# Altium PCB PCB_design01.PcbDoc
Units mm, origin at the board's own origin, x right, y up, seen from the top; angles counter-clockwise.
Board outline 101.47 x 99.44 mm, 2 copper layers (Top Layer, Bottom Layer); 55 components, 59 nets, 243 pads, 51 vias.
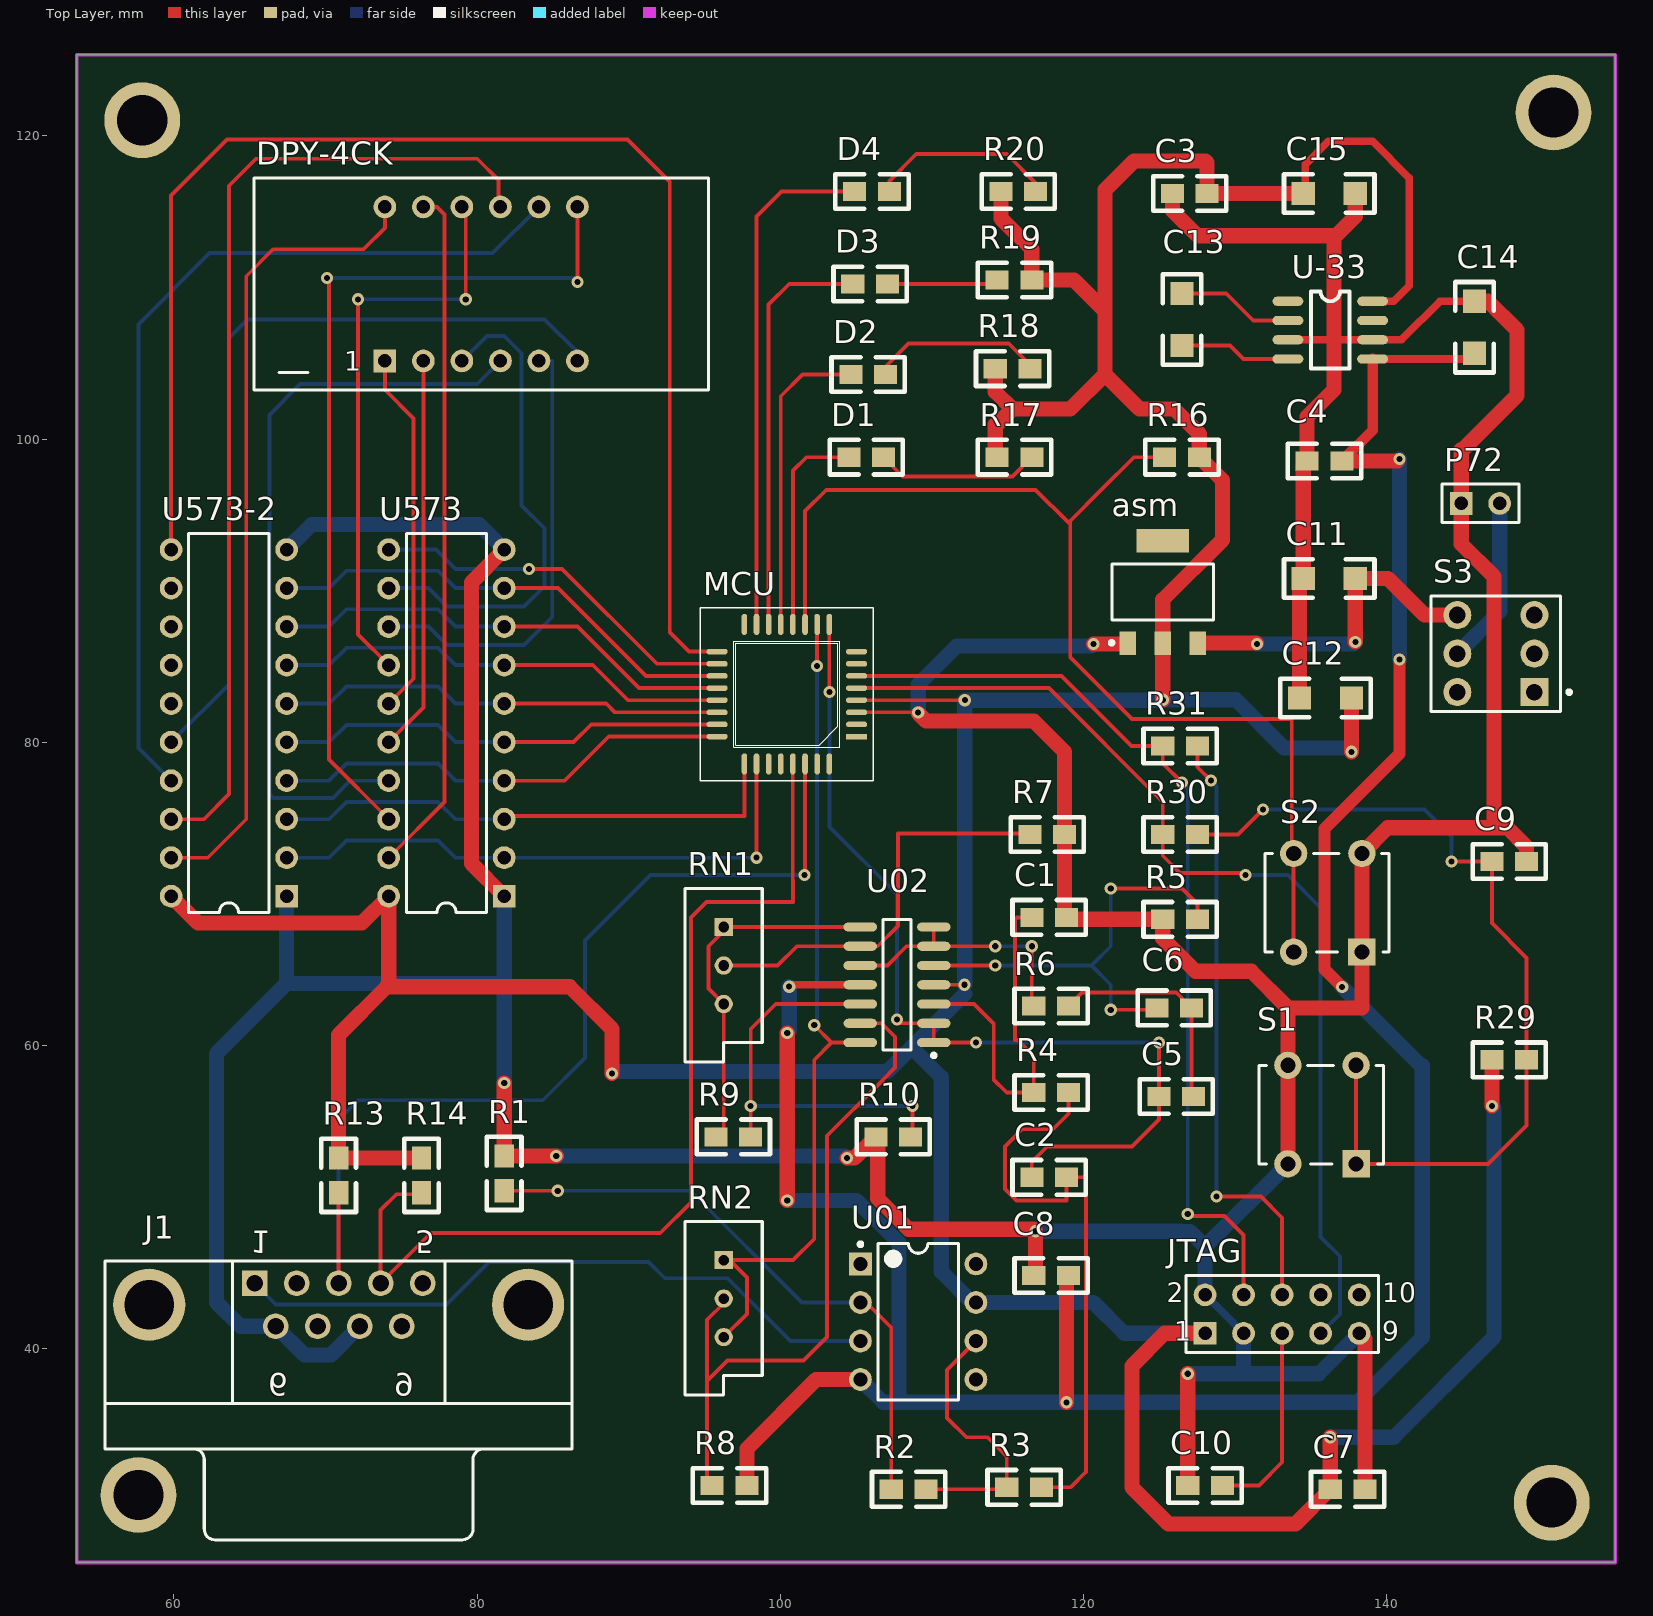
[diagram p0: Top Layer view]
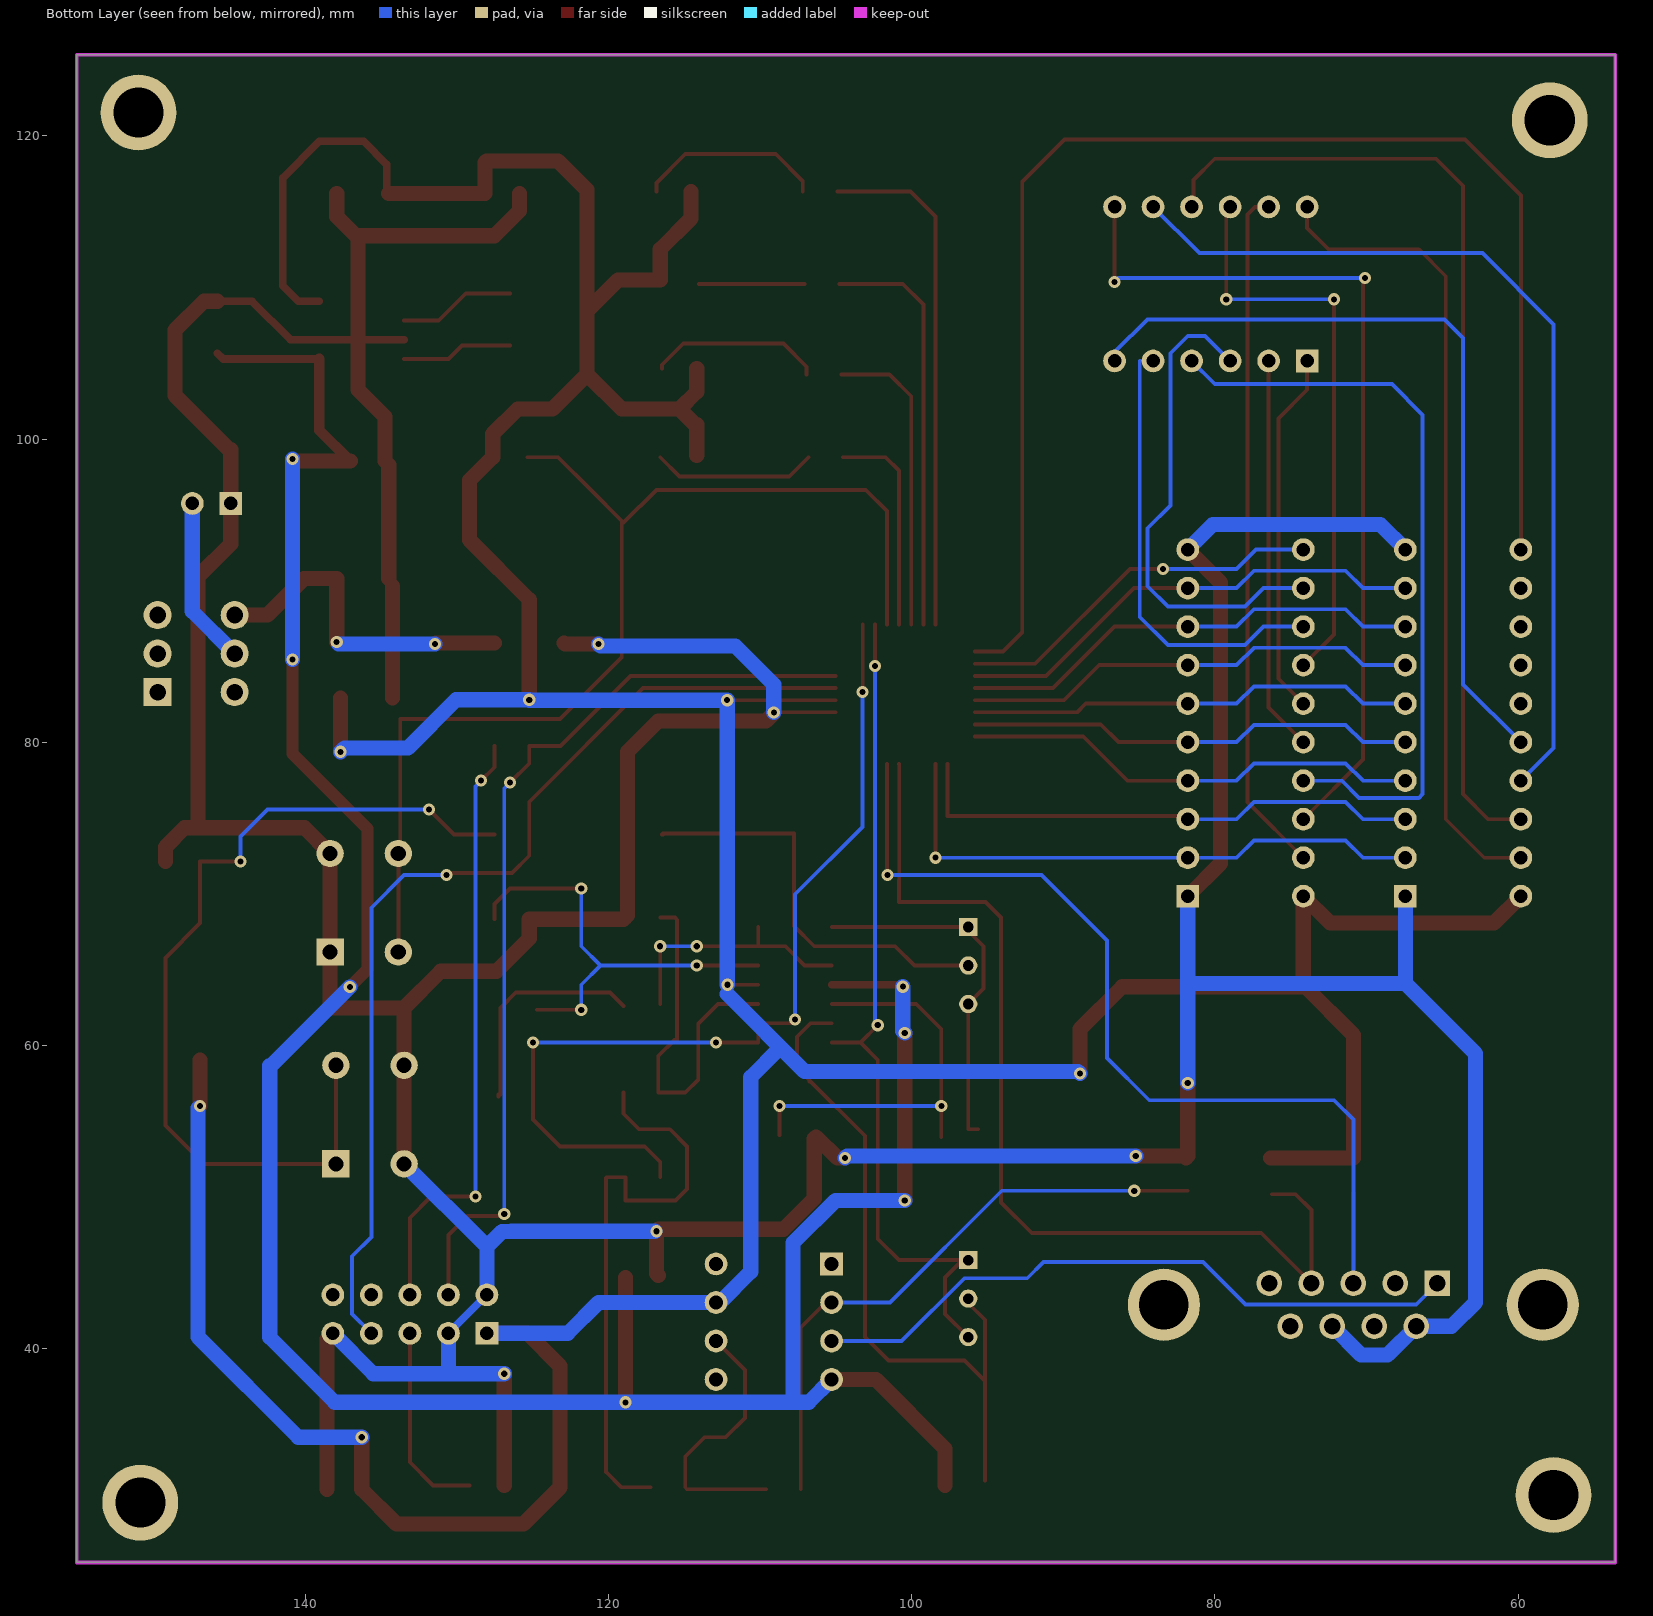
[diagram p1: Bottom Layer view, seen from below]

## Layer stack, top to bottom
Top Solder: solder mask 0.0102, Solder Resist, Dk 3.5
Top Layer: signal copper 0.0356
Dielectric 1: dielectric 0.32, FR-4, Dk 4.8
Bottom Layer: signal copper 0.0356
Bottom Solder: solder mask 0.0102, Solder Resist, Dk 3.5

## Board outline
53.594,25.908 155.067,25.908 155.067,125.349 53.594,125.349

## Design rules (kind name [scope] priority, off if disabled: settings)
Clearance [All] p1: gap=0.254
PolygonConnect [All] p1: connectstyle=Relief reliefconductorwidth=0.254 reliefentries=4 polygonreliefangle="90 Angle" airgapwidth=0.254
RoutingVias [All] p1: holewidth=0.4 width=0.8 viastyle="Through Hole" minholewidth=0.4 minwidth=0.8 maxholewidth=0.4 maxwidth=0.8
SolderMaskExpansion [All] p1: expansion=0.102
Width [All] p1: maxlimit=1 minlimit=0.254 preferedwidth=0.254 minimp=50.000000 maximp=50.000000 favimp=50.000000
30 further rules are at their usual default settings.

## Classes and differential pairs
component class design_cty: asm C1 C2 C3 C4 C5 C6 C7 C8 C9 C10 C11 C12 C13 C14 C15 D1 D2 D3 D4 J1 JTAG MCU P72 R1 R2 R3 R4 R5 R6 R7 R8 R9 R10 R13 R14 R16 R17 R18 R19 R20 R29 R30 R31 RN1 RN2 S1 S2 S3 U01 U02 U-33
component class Sheet2: DPY-4CK U573 U573-2

## Components (designator, comment, footprint, x,y, rotation, side; value= is the part's Value field where it differs from the comment)
asm "ASM1117" SOT-223 125.222,89.916 r0 top
C1 "Cap" 0805 118.872,68.453 r180 top
C2 "Cap" 0805 118.872,51.308 r180 top
C3 "Cap" 0805 128.143,116.205 r180 top
C4 "Cap" 0805 137.033,98.552 r180 top
C5 "Cap" 0805 124.968,56.642 r0 top
C6 "Cap" 0805 127.127,62.484 r180 top
C7 "Cap" 0805 136.271,30.734 r0 top
C8 "Cap" 0805 118.999,44.831 r180 top
C9 "Cap" 0805 149.225,72.136 r180 top
C10 "Cap" 0805 126.873,30.988 r0 top
C11 "Cap" 1206 134.493,90.805 r0 top
C12 "Cap" 1206 134.239,82.931 r0 top
C13 "Cap" 1206 126.492,109.601 r270 top
C14 "Cap" 1206 145.796,109.093 r270 top
C15 "Cap" 1206 137.922,116.205 r180 top
D1 "LED2" 0805 106.807,98.806 r180 top
D2 "LED2" 0805 106.934,104.267 r180 top
D3 "LED2" 0805 107.061,110.236 r180 top
D4 "LED2" 0805 107.188,116.332 r180 top
DPY-4CK "DPY-4CK" DYP-4BIT 80.264,110.236 r0 top
J1 "D Connector 9" DSUB1.385-2H9 70.866,33.401 r0 top
JTAG "Header 5X2" HDR2X5 128.016,41.021 r0 top
MCU "C8051F310" LQFP-32 105.029,85.979 r180 top
P72 "Header 2" HDR1X2 144.907,95.758 r0 top
R1 "Res2" 0805 81.788,52.705 r270 top
R2 "Res2" 0805 107.315,30.734 r0 top
R3 "Res2" 0805 114.935,30.861 r0 top
R4 "Res2" 0805 118.999,56.896 r180 top
R5 "Res2" 0805 125.222,68.326 r0 top
R6 "Res2" 0805 118.999,62.611 r180 top
R7 "Res2" 0805 118.745,73.914 r180 top
R8 "Res2" 0805 95.504,30.988 r0 top
R9 "Res2" 0805 95.758,53.975 r0 top
R10 "Res2" 0805 108.585,53.975 r180 top
R13 "Res2" 0805 70.866,50.292 r90 top
R14 "Res2" 0805 76.327,50.292 r90 top
R16 "Res2" 0805 125.349,98.806 r0 top
R17 "Res2" 0805 116.586,98.806 r180 top
R18 "Res2" 0805 116.459,104.648 r180 top
R19 "Res2" 0805 114.3,110.49 r0 top
R20 "Res2" 0805 116.84,116.332 r180 top
R29 "Res2" 0805 149.225,59.055 r180 top
R30 "Res2" 0805 127.508,73.914 r180 top
R31 "Res2" 0805 127.508,79.756 r180 top
RN1 "RPot" VR5 96.266,65.278 r270 top
RN2 "RPot" VR5 96.266,43.307 r270 top
S1 "K1" KEY1 133.477,52.197 r90 top
S2 "K1" KEY1 133.858,66.167 r90 top
S3 "SW-DPDT" DPDT-6 147.193,85.852 r180 top
U01 "OP-07" DIP-8 109.093,41.783 r0 top
U02 "TLC2274" SOP-14N 107.696,64.008 r180 top
U573 "SN74HC573N" N020D 77.978,81.28 r90 top
U573-2 "SN74HC573N" N020D 63.627,81.28 r90 top
U-33 "TC7662ACPA" SO-8 133.477,109.093 r0 top

## Footprints (in the part's own frame and the unit in brackets; to place one, negate y for a bottom-side part, rotate by r counter-clockwise, add the part's x,y. Pads: shape width x height; smd on the part's side, far side on the other; paste and mask are expansions set on the pad)
0805 [mil]
  rect 60x50 smd: 1(0,0) 2(90,0)
  silkscreen extent -50,-45 140,45
1206 [mil]
  rect 60x60 smd: 1(0,0) 2(135,0)
  silkscreen extent -50,-50 185,50
DIP-8 [mm] "DIP; 8 Leads; Row Spacing 7.62 mm; Pitch 2.54 mm"
  rect 1.5x1.5 hole 0.9: 1(-3.81,3.81)
  round 1.5 hole 0.9: 2(-3.81,1.27) 3(-3.81,-1.27) 4(-3.81,-3.81) 5(3.81,-3.81) 6(3.81,-1.27) 7(3.81,1.27) 8(3.81,3.81)
  silkscreen extent -3.93,-5.15 2.65,5.23, body extent -3.6,-5.15 3.6,5.15, height 5.08
DPDT-6 [mm] "Switch; 6 Leads"
  rect 1.85x1.85 hole 1.1: 1(-2.54,2.54)
  round 1.85 hole 1.1: 2(-2.54,0) 3(-2.54,-2.54) 4(2.54,-2.54) 5(2.54,0) 6(2.54,2.54)
  silkscreen extent -4.96,-3.81 4.28,3.81
DSUB1.385-2H9 [mm] "Connector; D Subminiature; 9 Position; Right Angle; Pitch 1.385 mm"
  rect 1.69x1.69 hole 1.09: 1(-5.54,10.92)
  round 1.69 hole 1.09: 2(-2.77,10.92) 3(0,10.92) 4(2.77,10.92) 5(5.54,10.92) 6(-4.155,8.08) 7(-1.385,8.08) 8(1.385,8.08) 9(4.155,8.08)
  round 4.76 hole 3.26: 10(-12.495,9.5) 11(12.495,9.5)
  silkscreen extent -15.4,-6 15.4,12.4
DYP-4BIT [mm] "数码管"
  rect 1.5x1.5 hole 0.9: 1(-6.35,-5.08)
  round 1.5 hole 0.9: 2(-3.81,-5.08) 3(-1.27,-5.08) 4(1.27,-5.08) 5(3.81,-5.08) 6(6.35,-5.08) 7(6.35,5.08) 8(3.81,5.08) 9(1.27,5.08) 10(-1.27,5.08) 11(-3.81,5.08) 12(-6.35,5.08)
  silkscreen extent -14.99,-6.98 14.99,6.98
HDR1X2 [mm] "Connector; Header; 2 Position"
  rect 1.5x1.5 hole 0.9: 1(0,0)
  round 1.5 hole 0.9: 2(2.54,0)
  silkscreen extent -1.27,-1.27 3.81,1.27
HDR2X5 [mm] "Connector; Header; 5x2 Position"
  rect 1.5x1.5 hole 0.9: 1(0,0)
  round 1.5 hole 0.9: 2(0,2.54) 3(2.54,0) 4(2.54,2.54) 5(5.08,0) 6(5.08,2.54) 7(7.62,0) 8(7.62,2.54) 9(10.16,0) 10(10.16,2.54)
  silkscreen extent -1.27,-1.27 11.43,3.81
KEY1 [mm]
  rect 1.8x1.8 hole 1: 1(0,-4.5)
  round 1.8 hole 1: 2(6.5,-4.5) 3(6.5,0) 4(0,0)
  silkscreen extent 0,-6.3 6.5,1.9
LQFP-32 [mm]
  rect 1.4x0.37 smd: 1(0,5.6)
  oval 1.4x0.37 smd: 2(0,4.8) 3(0,4) 4(0,3.2) 5(0,2.4) 6(0,1.6) 7(0,0.8) 8(0,0) 17(9.2,0) 18(9.2,0.8) 19(9.2,1.6) 20(9.2,2.4) 21(9.2,3.2) 22(9.2,4) 23(9.2,4.8) 24(9.2,5.6)
  oval 0.37x1.4 smd: 9(1.8,-1.8) 10(2.6,-1.8) 11(3.4,-1.8) 12(4.2,-1.8) 13(5,-1.8) 14(5.8,-1.8) 15(6.6,-1.8) 16(7.4,-1.8) 25(7.4,7.4) 26(6.6,7.4) 27(5.8,7.4) 28(5,7.4) 29(4.2,7.4) 30(3.4,7.4) 31(2.6,7.4) 32(1.8,7.4)
  silkscreen extent -1.1,-2.9 10.3,8.5
N020D [mm] "DIP; 20 Leads; Row Spacing 7.62 mm; Pitch 2.54 mm"
  rect 1.5x1.5 hole 0.9: 1(-11.43,-3.81)
  round 1.5 hole 0.9: 2(-8.89,-3.81) 3(-6.35,-3.81) 4(-3.81,-3.81) 5(-1.27,-3.81) 6(1.27,-3.81) 7(3.81,-3.81) 8(6.35,-3.81) 9(8.89,-3.81) 10(11.43,-3.81) 11(11.43,3.81) 12(8.89,3.81) 13(6.35,3.81) 14(3.81,3.81) 15(1.27,3.81) 16(-1.27,3.81) 17(-3.81,3.81) 18(-6.35,3.81) 19(-8.89,3.81) 20(-11.43,3.81)
  silkscreen extent -12.5,-2.65 12.5,2.65
SO-8 [mil]
  oval 80x24 smd: 1(0,0) 2(0,-50) 3(0,-100) 4(0,-150) 5(220,-150) 6(220,-100) 7(220,-50) 8(220,0)
  silkscreen extent 60,-175 160,25
SOP-14N [mm] "SOP, 14-Leads,"
  oval 2.2x0.6 smd: 1(-2.425,3.81) 2(-2.425,2.54) 3(-2.425,1.27) 4(-2.425,0) 5(-2.425,-1.27) 6(-2.425,-2.54) 7(-2.425,-3.81) 8(2.425,-3.81) 9(2.425,-2.54) 10(2.425,-1.27) 11(2.425,0) 12(2.425,1.27) 13(2.425,2.54) 14(2.425,3.81)
  silkscreen extent -2.55,-4.3 0.93,4.78, body extent -2,-4.28 2,4.28, height 1.75
SOT-223 [mm]
  rect 1.1x1.55 smd: 1(-2.3,-3.375) 2(0,-3.375) 3(2.3,-3.375)
  rect 3.45x1.55 smd: 4(0,3.375)
  silkscreen extent -3.5,-3.48 3.35,1.85, body extent -3.3,-3.94 3.3,3.43, height 0.8
VR5 [mm] "Thru-Hole; 3 Leads"
  rect 1.2x1.2 hole 0.7: 1(-2.54,0)
  round 1.2 hole 0.7: 2(0,0) 3(2.54,0)
  silkscreen extent -5.08,-2.54 6.35,2.54

## Part data
asm: "3.3V稳压芯片"
C1 C2 C3 C4 C5 C6 C7 C8 C9 C10 C11 C12 C13 C14 C15: "Capacitor"
D1 D2 D3 D4: "Typical RED, GREEN, YELLOW, AMBER GaAs LED"
DPY-4CK: "共阴4位数码管"
J1: "Receptacle Assembly, 9 Position, Right Angle"
JTAG: "Header, 5-Pin, Dual row"
MCU: library part C8051F310/2/4_361/4/6/8
P72: "Header, 2-Pin"
R1 R2 R3 R4 R5 R6 R7 R8 R9 R10 R13 R14 R16 R17 R18 R19 R20 R29 R30 R31: "Resistor"
RN1 RN2: "Potentiometer"
S3: "Double-Pole, Double-Throw Switch"
U02: library part LM324
U573 U573-2: "Octal D-Type Transparent Latch with 3-State Outputs"
U-33: "Super Charge Pump DC-to-DC Voltage Converter, 12kHz, 8-Pin PDIP, Commercial Temperature"

## Free pads (board coordinates)
  round 5 hole 3.3: 0(151.003,121.539) 1(150.876,29.845) 2(57.658,30.353) 3(57.912,121.031)

## Via types
v1: diameter 0.8, hole 0.4, Top Layer to Bottom Layer, 51 vias

## Nets (pads, with @x,y where several pads share a name; then routed paths per layer and width w, separated by ;. In a path a pad name is that pad's centre, name@x,y a point inside that pad or via, vN(x,y) a via of type N, cw(c..) or ccw(c..) an arc to the next point about the centre after c; other vN are vias at no path point)
A: DPY-4CK.11 U573.19 | length 45.6
  Top Layer w0.254: U573.19 77.851,76.073 77.851,114.808 77.343,115.316 DPY-4CK.11
AC: MCU.10 RN2.1 RN2.3 U02.14 | length 55.8
  Top Layer w0.254: RN2.3 97.79,42.291 97.79,44.704 96.647,45.847 100.838,45.847 102.235,47.244 102.235,59.055 103.378,60.198 ; v1(102.235,61.341) 103.378,60.198 ; v1(102.429,85.023) MCU.10 ; U02.14 103.378,60.198
  Bottom Layer w0.254: v1(102.235,61.341) 102.429,61.535 v1(102.429,85.023)
B: DPY-4CK.7 U573.18 | length 58.9
  Top Layer w0.254: v1(70.104,110.617) 70.231,110.49 70.231,78.867 U573.18 ; v1(86.614,110.363) DPY-4CK.7
  Bottom Layer w0.254: v1(70.104,110.617) 86.36,110.617 v1(86.614,110.363)
C: DPY-4CK.4 U573.17 | length 50.2
  Bottom Layer w0.254: U573.17 71.628,77.47 70.485,76.327 66.548,76.327 66.294,76.581 66.294,101.6 68.326,103.632 80.01,103.632 DPY-4CK.4
C2D: JTAG.4 MCU.6 R31.2 | length 61.9
  Top Layer w0.254: MCU.6 118.542,84.379 123.165,79.756 R31.2 125.222,78.613 v1(126.492,77.343) ; v1(126.873,48.895) 126.873,48.768 129.286,48.768 130.556,47.498 JTAG.4
  Bottom Layer w0.254: v1(126.492,77.343) 126.873,76.962 v1(126.873,48.895)
D: DPY-4CK.2 U573.16 | length 26.1
  Top Layer w0.254: U573.16 76.454,82.296 DPY-4CK.2
D0: MCU.26 U573-2.2 U573.2 | length 38.1
  Top Layer w0.254: v1(98.429,72.39) MCU.26
  Bottom Layer w0.254: U573-2.2 70.231,72.39 71.374,73.533 77.419,73.533 78.562,72.39 U573.2 v1(98.429,72.39)
D1: MCU.25 U573-2.3 U573.3 | length 34.3
  Top Layer w0.254: U573.3@82.008,75.15 97.629,75.15 MCU.25
  Bottom Layer w0.254: U573-2.3 70.231,74.93 71.374,76.073 77.419,76.073 78.562,74.93 U573.3
D2: MCU.24 U573-2.4 U573.4 | length 30.5
  Top Layer w0.254: U573.4 85.776,77.47 88.685,80.379 MCU.24
  Bottom Layer w0.254: U573-2.4 70.231,77.47 71.374,78.613 77.419,78.613 78.562,77.47 U573.4
D3: MCU.23 U573-2.5 U573.5 | length 29.8
  Top Layer w0.254: U573.5 86.36,80.01 87.529,81.179 MCU.23
  Bottom Layer w0.254: U573-2.5 70.231,80.01 71.374,81.153 77.419,81.153 78.562,80.01 U573.5
D4: MCU.22 U573-2.6 U573.6 | length 29.6
  Top Layer w0.254: U573.6 88.519,82.55 89.09,81.979 MCU.22
  Bottom Layer w0.254: U573-2.6 70.231,82.55 71.374,83.693 77.419,83.693 78.562,82.55 U573.6
D5: MCU.21 U573-2.7 U573.7 | length 30.3
  Top Layer w0.254: U573.7 87.63,85.09 89.941,82.779 MCU.21
  Bottom Layer w0.254: U573-2.7 70.231,85.09 71.374,86.233 77.419,86.233 78.562,85.09 U573.7
D6: MCU.20 U573-2.8 U573.8 | length 31
  Top Layer w0.254: U573.8 86.614,87.63 90.665,83.579 MCU.20
  Bottom Layer w0.254: U573-2.8 70.231,87.63 71.374,88.773 77.419,88.773 78.562,87.63 U573.8
D7: MCU.19 U573-2.9 U573.9 | length 31.7
  Top Layer w0.254: U573.9 85.344,90.17 91.135,84.379 MCU.19
  Bottom Layer w0.254: U573-2.9 70.231,90.17 71.374,91.313 77.419,91.313 78.562,90.17 U573.9
DC: C2.2 C5.1 MCU.9 U02.1 U02.2 | length 62.2
  Top Layer w0.254: MCU.9 103.229,83.29 v1(103.251,83.312) ; v1(107.696,61.722) 107.95,61.468 U02.2 U02.1 v1(112.903,60.198) ; C2.2 116.586,52.324 117.602,53.34 123.19,53.34 124.968,55.118 C5.1 v1(124.968,60.198)
  Bottom Layer w0.254: v1(103.251,83.312) 103.251,74.422 107.696,69.977 v1(107.696,61.722) ; v1(112.903,60.198) v1(124.968,60.198)
E: DPY-4CK.1 U573.15 | length 24.1
  Top Layer w0.254: DPY-4CK.1 73.914,103.251 75.807,101.358 75.807,84.189 U573.15
F: DPY-4CK.10 U573.14 | length 38.1
  Top Layer w0.254: v1(72.136,109.22) 72.136,87.122 U573.14 ; DPY-4CK.10@79.121,115.189 79.248,115.062 v1(79.248,109.22)
  Bottom Layer w0.254: v1(72.136,109.22) v1(79.248,109.22)
G: DPY-4CK.5 U573.13 | length 29.8
  Bottom Layer w0.254: U573.13 76.784,87.63 78.003,86.411 83.097,86.411 84.951,88.265 84.951,105.156 DPY-4CK.5
GND: asm.1 C1.1 C3.2 C4.2 C7.2 C8.2 C9.1 C10.1 C11.1 C12.1 C14.1 C15.1 J1.6 J1.8 JTAG.2 JTAG.3 JTAG.9 MCU.3 P72.1 R1.1 R5.1 R7.1 R10.2 S1.3 S1.4 S2.1 S2.2 U573-2.1 U573-2.10 U573.1 U573.10 U-33.3 U-33.6 | length 411.7
  Top Layer w0.254: MCU.3 v1(109.093,81.979) v1@109.11,81.979 ; C11.1@134.493,90.297 C11.1
  Top Layer w0.5: U-33.3 136.525,106.553 U-33.6 140.97,106.553 143.51,109.093 C14.1
  Top Layer w1: v1(81.788,57.531) R1.1 81.915,52.578 82.042,52.705 v1(85.217,52.705) ; U573.1 79.629,72.009 79.629,90.551 U573.10 ; v1(104.394,52.578) 104.902,52.578 R10.2 106.426,53.848 106.426,49.911 108.458,47.879 116.713,47.879 v1(116.84,47.752) 116.84,44.958 C8.2 ; v1@109.11,81.898 109.601,81.407 116.713,81.407 118.745,79.375 R7.1 C1.1@118.745,68.58 ; C1.1 118.999,68.326 R5.1 125.222,67.056 127.381,64.897 131.064,64.897 133.477,62.484 ; v1(120.65,86.487) 122.868,86.487 asm.1 ; C3.2 125.857,115.062 127.508,113.411 136.652,113.411 ; C10.1 v1(126.873,38.354) ; S1.4 S1.3 133.477,62.484 ; C12.1 C11.1@134.239,90.297 ; C11.1 C4.2@134.493,98.298 ; C4.2 134.747,101.473 136.525,103.251 136.525,106.553 136.525,113.284 136.652,113.411 ; C15.1 137.922,114.681 136.652,113.411 ; 138.358,62.484 133.477,62.484 ; 138.358,62.666 S2.1 S2.2 140.058,74.367 147.066,74.367 ; C7.2 JTAG.9@138.557,40.64 ; 144.907,99.314 P72.1 144.907,93.091 147.066,90.932 147.066,74.367 ; 145.034,99.314 148.59,102.87 148.59,107.188 146.685,109.093 C14.1 ; C9.1 149.225,73.097 147.955,74.367 147.066,74.367
  Bottom Layer w0.254: U573-2.10 U573-2.10@67.564,92.71 ; v1(116.84,47.752) v1@116.94,47.752
  Bottom Layer w0.5: JTAG.2 JTAG.3
  Bottom Layer w1: U573-2.1 67.437,64.087 ; U573-2.10 69.088,94.361 80.137,94.361 U573.10 ; 68.58,39.612 J1.6 64.389,41.481 62.817,43.053 62.817,59.467 67.437,64.087 ; 68.604,39.588 70.358,39.588 J1.8 ; 81.613,64.087 67.437,64.087 ; v1(81.788,57.531) U573.1 ; v1(85.217,52.705) 104.267,52.705 v1(104.394,52.578) ; v1(109.093,81.979) 109.093,83.82 111.633,86.36 120.523,86.36 v1(120.65,86.487) ; v1@116.94,47.752 126.384,47.752 126.395,47.741 127.011,47.741 128.016,46.736 ; v1(126.873,38.354) 130.556,38.354 ; JTAG.2 128.016,46.736 ; JTAG.3 130.556,38.354 ; S1.4 128.016,46.736 ; JTAG.9 135.509,38.354 130.556,38.354
H: DPY-4CK.3 U573.12 | length 32.4
  Bottom Layer w0.254: U573.12 76.784,90.17 78.003,88.951 83.097,88.951 84.443,90.297 84.443,94.119 82.931,95.631 82.931,105.664 81.788,106.807 80.645,106.807 DPY-4CK.3
LED1: D1.2 MCU.12 | length 14.2
  Top Layer w0.254: MCU.12 100.829,97.917 ; 100.838,97.917 101.727,98.806 D1.2
LED2: D2.2 MCU.13 | length 20.3
  Top Layer w0.254: MCU.13 100.029,102.823 101.473,104.267 D2.2
LED3: D3.2 MCU.14 | length 27.2
  Top Layer w0.254: MCU.14 99.229,108.881 100.584,110.236 D3.2
LED4: D4.2 MCU.15 | length 34.1
  Top Layer w0.254: MCU.15 98.429,114.681 100.08,116.332 D4.2
LED_INFRARED: J1.4 MCU.29 R14.1 | length 65.6
  Top Layer w0.254: R14.1@76.224,50.189 74.676,50.189 73.636,49.149 J1.4 76.94,47.625 92.075,47.625 94.107,49.657 94.107,68.453 95.123,69.469 100.838,69.469 100.838,70.904 100.819,70.924 100.819,78.569 MCU.29
LED_RED: J1.3 MCU.30 R13.1 | length 66.1
  Top Layer w0.254: J1.3 R13.1 ; v1(101.6,71.247) 101.629,71.276 MCU.30
  Bottom Layer w0.254: J1.3 70.866,55.118 72.136,56.388 84.328,56.388 87.122,59.182 87.122,66.929 91.44,71.247 v1(101.6,71.247)
Netasm_3: asm.3 C11.2 S3.4 | length 22.4
  Top Layer w0.254: v1@131.391,86.541 v1(131.445,86.487)
  Top Layer w1: asm.3 v1@131.391,86.541 ; v1(137.922,86.614) C11.2 140.081,90.805 142.494,88.392 S3.4
  Bottom Layer w0.254: v1@137.795,86.487 v1(137.922,86.614)
  Bottom Layer w1: v1(131.445,86.487) v1@137.795,86.487
NetC1_2: C1.2 R4.2 U02.3 | length 24.4
  Top Layer w0.254: U02.3 112.776,62.738 114.071,61.443 114.071,57.76 114.935,56.896 R4.2 116.713,59.309 115.646,60.376 115.468,60.376 115.468,68.301 115.621,68.453 C1.2
NetC2_1: C2.1 R3.2 R4.1 | length 39.2
  Top Layer w0.254: R3.2 119.126,30.861 120.142,31.877 ; R4.1 118.999,55.499 117.983,54.483 115.951,54.483 114.808,53.34 114.808,50.546 115.57,49.784 118.872,49.784 C2.1 120.142,51.308 120.167,51.283 120.167,31.877
NetC5_2: C5.2 C6.1 R6.1 | length 14.8
  Top Layer w0.254: R6.1 119.888,63.5 126.111,63.5 C6.1 C5.2@127.127,56.769 ; C5.2 C5.2@127.254,56.769
NetC6_2: C6.2 R5.2 U02.5 | length 29.5
  Top Layer w0.254: U02.5 v1(114.173,65.278) ; v1(121.793,62.357) C6.2@124.714,62.357 ; v1(121.793,70.358) 126.492,70.358 127.508,69.342 R5.2
  Bottom Layer w0.254: v1(114.173,65.278) 120.523,65.278 ; v1(121.793,62.357) 121.793,64.008 120.523,65.278 ; v1(121.793,70.358) 121.793,66.548 120.523,65.278
NetC9_2: C9.2 R29.1 R30.1 S1.1 S1.2 | length 59.6
  Top Layer w0.254: R30.1 130.175,73.914 v1(131.826,75.565) ; S1.2 S1.1 146.685,52.197 149.225,54.737 R29.1 149.225,65.786 146.939,68.072 C9.2 v1(144.272,72.136)
  Bottom Layer w0.254: v1(131.826,75.565) 142.494,75.565 144.272,73.787 v1(144.272,72.136)
NetC10_2: C10.2 JTAG.5 | length 13.1
  Top Layer w0.254: C10.2 131.572,30.988 133.096,32.512 JTAG.5
NetC13_1: C13.1 U-33.2 | length 7.7
  Top Layer w0.254: C13.1 129.413,109.601 131.191,107.823 U-33.2
NetC13_2: C13.2 U-33.4 | length 7.4
  Top Layer w0.254: C13.2 129.667,106.172 130.556,105.283 U-33.4
NetD1_1: D1.1 R17.1 | length 10.8
  Top Layer w0.254: D1.1 108.077,97.536 115.316,97.536 R17.1
NetD2_1: D2.1 R18.1 | length 11.5
  Top Layer w0.254: D2.1 106.934,104.775 108.458,106.299 115.062,106.299 116.459,104.902 R18.1
NetD3_1: D3.1 R19.1 | length 7
  Top Layer w0.254: D3.1 R19.1@114.046,110.236
NetD4_1: D4.1 R20.1 | length 12.4
  Top Layer w0.254: D4.1 107.188,117.018 108.966,118.796 114.935,118.796 116.84,116.891 R20.1
NetJTAG_6: JTAG.6 R31.1 | length 40.2
  Top Layer w0.254: R31.1 127.508,78.359 v1(128.397,77.47) ; v1(128.778,50.038) 131.699,50.038 133.096,48.641 JTAG.6
  Bottom Layer w0.254: v1(128.397,77.47) 128.778,77.089 v1(128.778,50.038)
NetP72_2: P72.2 S3.5 | length 11.1
  Bottom Layer w1: S3.5 147.447,88.646 P72.2
NetR1_2: R1.2 R2.1 U01.2 | length 39.9
  Top Layer w0.254: R1.2 v1(85.319,50.419) ; U01.2 105.664,43.053 107.315,41.402 R2.1
  Bottom Layer w0.254: v1(85.319,50.419) 94.056,50.419 101.422,43.053 U01.2
NetR6_2: R6.2 U02.6 U02.7 U02.10 | length 16.9
  Top Layer w0.254: U02.10 107.061,65.278 108.331,66.548 U02.6 ; U02.7 U02.6 ; v1(114.173,66.548) U02.6 ; R6.2@116.586,62.738 v1(116.586,66.548)
  Bottom Layer w0.254: v1(114.173,66.548) v1(116.586,66.548)
NetR7_2: R7.2 RN1.2 U02.9 | length 27.4
  Top Layer w0.254: RN1.2 99.822,65.278 101.092,66.548 U02.9 106.426,66.548 107.759,67.882 107.759,73.977 R7.2@116.395,73.977 ; R7.2@116.395,73.914 R7.2
NetR8_1: R8.1 RN2.2 U02.13 | length 46.1
  Top Layer w0.254: R8.1@95.174,31.318 95.174,37.871 ; RN2.2 96.266,43.002 95.174,41.91 95.174,37.871 ; U02.13 106.68,61.468 106.752,61.396 107.569,60.579 107.569,58.547 106.731,57.709 ; 95.174,37.871 96.52,39.218 101.524,39.218 103.073,40.767 103.073,54.051 106.629,57.607 ; 106.629,57.607 106.731,57.607 106.731,57.709 ; 106.629,57.607 106.731,57.709
NetR9_1: R9.1 RN1.1 RN1.3 U02.8 | length 23.8
  Top Layer w0.254: R9.1@95.631,54.483 96.266,54.483 RN1.3 95.25,63.754 95.25,66.548 96.266,67.564 RN1.1 U02.8
NetR9_2: R9.2 R10.1 U02.12 | length 27.7
  Top Layer w0.254: R9.2 v1(98.044,56.007) 98.044,61.087 99.695,62.738 U02.12 ; R10.1@108.712,54.102 v1(108.712,56.007)
  Bottom Layer w0.254: v1(98.044,56.007) 108.458,56.007 108.585,55.88 v1(108.712,56.007)
P2.0: MCU.18 U573.11 | length 24.8
  Top Layer w0.254: v1(83.414,91.44) 85.598,91.44 91.859,85.179 MCU.18
  Bottom Layer w0.254: U573.11 77.292,92.71 78.562,91.44 v1(83.414,91.44)
P2.1: MCU.17 U573-2.11 | length 92.3
  Top Layer w0.254: U573-2.11 59.817,116.078 63.5,119.761 89.916,119.761 92.71,116.967 92.71,87.249 93.98,85.979 MCU.17
S1: JTAG.7 MCU.5 R30.2 | length 67.8
  Top Layer w0.254: MCU.5 117.716,83.579 125.222,76.073 R30.2 125.222,72.517 126.365,71.374 130.556,71.374 v1(130.683,71.247)
  Bottom Layer w0.254: v1(130.683,71.247) 133.477,71.247 135.636,69.088 135.636,47.371 136.906,46.101 136.906,42.291 JTAG.7
S2: MCU.11 R16.1 S2.3 S2.4 | length 75
  Top Layer w0.254: MCU.11 101.629,95.25 103.026,96.647 116.84,96.647 118.999,94.488 119.126,94.615 ; R16.1 123.317,98.806 121.158,96.647 119.126,94.615 ; S2.3@133.731,72.794 133.731,81.534 123.19,81.534 119.126,85.598 119.126,94.615 ; S2.4 S2.3
V3.3: asm.2 C3.1 C7.1 C12.2 C15.2 JTAG.1 MCU.4 R13.2 R14.2 R16.2 R17.2 R18.2 R19.2 R20.2 R29.2 U01.7 U02.4 U573-2.20 U573.20 U-33.8 | length 343.1
  Top Layer w0.254: MCU.4 v1(112.166,82.779) ; U02.4 v1(112.141,64.008)
  Top Layer w0.5: C15.2@134.62,116.332 134.62,118.11 136.144,119.634 139.065,119.634 141.478,117.221 141.478,110.109 140.462,109.093 U-33.8
  Top Layer w1: U573-2.20 61.595,68.072 72.39,68.072 U573.20 74.168,64.008 ; R14.2 R13.2 70.866,60.706 74.041,63.881 86.106,63.881 88.9,61.087 v1(88.9,58.166) ; R17.2@114.173,98.933 114.173,100.965 114.3,100.965 115.316,101.981 ; R18.2 114.173,103.124 115.316,101.981 ; R20.2 114.554,114.554 116.586,112.522 R19.2 119.38,110.49 121.412,108.458 ; 121.412,116.459 121.412,108.458 ; 121.437,116.459 123.317,118.339 128.041,118.339 128.143,118.237 C3.1 C15.2 ; v1(125.222,82.804) asm.2 125.222,89.408 129.159,93.345 129.159,97.282 R16.2 127.635,100.33 125.984,101.981 123.698,101.981 121.412,104.267 ; JTAG.1 125.349,41.021 123.19,38.862 123.19,30.861 125.603,28.448 133.985,28.448 C7.1 v1(136.271,34.163) ; v1(137.668,79.375) C12.2 ; v1(146.939,56.007) R29.2 ; 115.316,101.981 119.126,101.981 121.412,104.267 ; 121.412,104.267 121.412,108.458
  Bottom Layer w1: v1(88.9,58.166) 89.027,58.293 107.061,58.293 112.166,63.398 ; 108.712,59.817 110.617,57.912 110.617,45.085 112.649,43.053 U01.7 120.65,43.053 122.682,41.021 JTAG.1 ; v1@112.166,64.008 v1(112.166,82.779) 125.197,82.779 v1(125.222,82.804) 130.048,82.804 133.223,79.629 137.414,79.629 v1(137.668,79.375) ; v1(136.271,34.163) 140.462,34.163 147.066,40.767 v1@147.066,55.88
V-3.3: C4.1 C8.1 C14.2 R8.2 U01.4 U02.11 U-33.5 | length 178.5
  Top Layer w0.254: v1(100.584,63.881) v1@100.711,64.008 ; C8.1@118.872,44.704 C8.1
  Top Layer w0.5: v1@100.711,64.008 U02.11 ; U-33.5 145.415,105.283 C14.2 ; v1@140.716,98.679 v1(140.843,98.679)
  Top Layer w0.7: C4.1 139.065,100.584 U-33.5
  Top Layer w0.8: v1(137.058,63.856) 135.89,65.024 135.89,74.295 140.843,79.248 v1(140.843,85.471)
  Top Layer w1: R8.2 97.79,33.401 102.362,37.973 U01.4 ; v1(100.457,49.784) v1(100.457,60.833) ; v1(118.872,36.469) C8.1@118.872,44.704 ; C4.1 v1@140.716,98.552
  Bottom Layer w1: v1(100.457,49.784) 105.029,49.784 107.823,46.99 107.823,36.469 ; v1(100.457,60.833) 100.584,60.96 v1(100.584,63.881) ; U01.4 106.787,36.469 107.823,36.469 ; v1(137.058,63.856) 142.24,58.674 ; v1(140.843,85.471) v1(140.843,98.679) ; 142.342,58.674 142.342,40.762 138.049,36.469 v1(118.872,36.469) 107.823,36.469
VOUT0: J1.1 U01.3 | length 43.8
  Bottom Layer w0.254: J1.1 66.721,42.926 77.978,42.926 80.772,45.72 91.313,45.72 92.38,44.653 96.52,44.653 100.66,40.513 U01.3
VOUT1: R2.2 R3.1 U01.6 | length 18.1
  Top Layer w0.254: R2.2 R3.1@114.808,30.734 ; U01.6 110.998,38.608 110.998,35.433 112.268,34.163 113.665,34.163 114.935,32.893 R3.1
WE1: DPY-4CK.12 U573-2.19 | length 53.7
  Top Layer w0.254: U573-2.19 62.23,72.39 64.77,74.93 64.77,110.744 66.548,112.522 72.517,112.522 73.914,113.919 DPY-4CK.12
WE2: DPY-4CK.9 U573-2.18 | length 65.4
  Top Layer w0.254: U573-2.18 61.976,74.93 63.627,76.581 63.627,116.713 65.405,118.491 80.01,118.491 81.407,117.094 DPY-4CK.9@81.407,115.443
WE3: DPY-4CK.8 U573-2.17 | length 60.6
  Bottom Layer w0.254: U573-2.17 57.658,79.629 57.658,107.569 62.357,112.268 81.026,112.268 DPY-4CK.8
WE4: DPY-4CK.6 U573-2.16 | length 53.2
  Bottom Layer w0.254: U573-2.16 63.627,83.82 63.627,106.68 64.846,107.899 84.455,107.899 86.614,105.74 DPY-4CK.6
pads on no net: asm.4 J1.2 J1.5 J1.7 J1.9 J1.10 J1.11 JTAG.8 JTAG.10 MCU.1 MCU.2 MCU.7 MCU.8 MCU.16 MCU.27 MCU.28 MCU.31 MCU.32 S3.1 S3.2 S3.3 S3.6 U01.1 U01.5 U01.8 U573-2.12 U573-2.13 U573-2.14 U573-2.15 U-33.1 U-33.7

## Keep-outs
Keep-Out Layer:
  the board outline again, w0.254

## Text inside footprints (layer, text, board x,y; h text height)
DPY-4CK: Top Overlay "1" at 71.247,104.521 h1.27
J1: Top Overlay "1" at 65.076,47.776 h1.5 r180; Top Overlay "5" at 75.906,47.776 h1.5 r180; Top Overlay "9" at 74.521,38.376 h1.5 r180; Top Overlay "6" at 66.211,38.376 h1.5 r180
JTAG: Top Overlay "2" at 125.476,43.053 h1.27; Top Overlay "1" at 125.984,40.513 h1.27; Top Overlay "9" at 139.7,40.513 h1.27; Top Overlay "10" at 139.7,43.053 h1.27